# EAGLE board Placasuperiorrobocup2025_JEDM (1) (EAGLE 9.6.2)
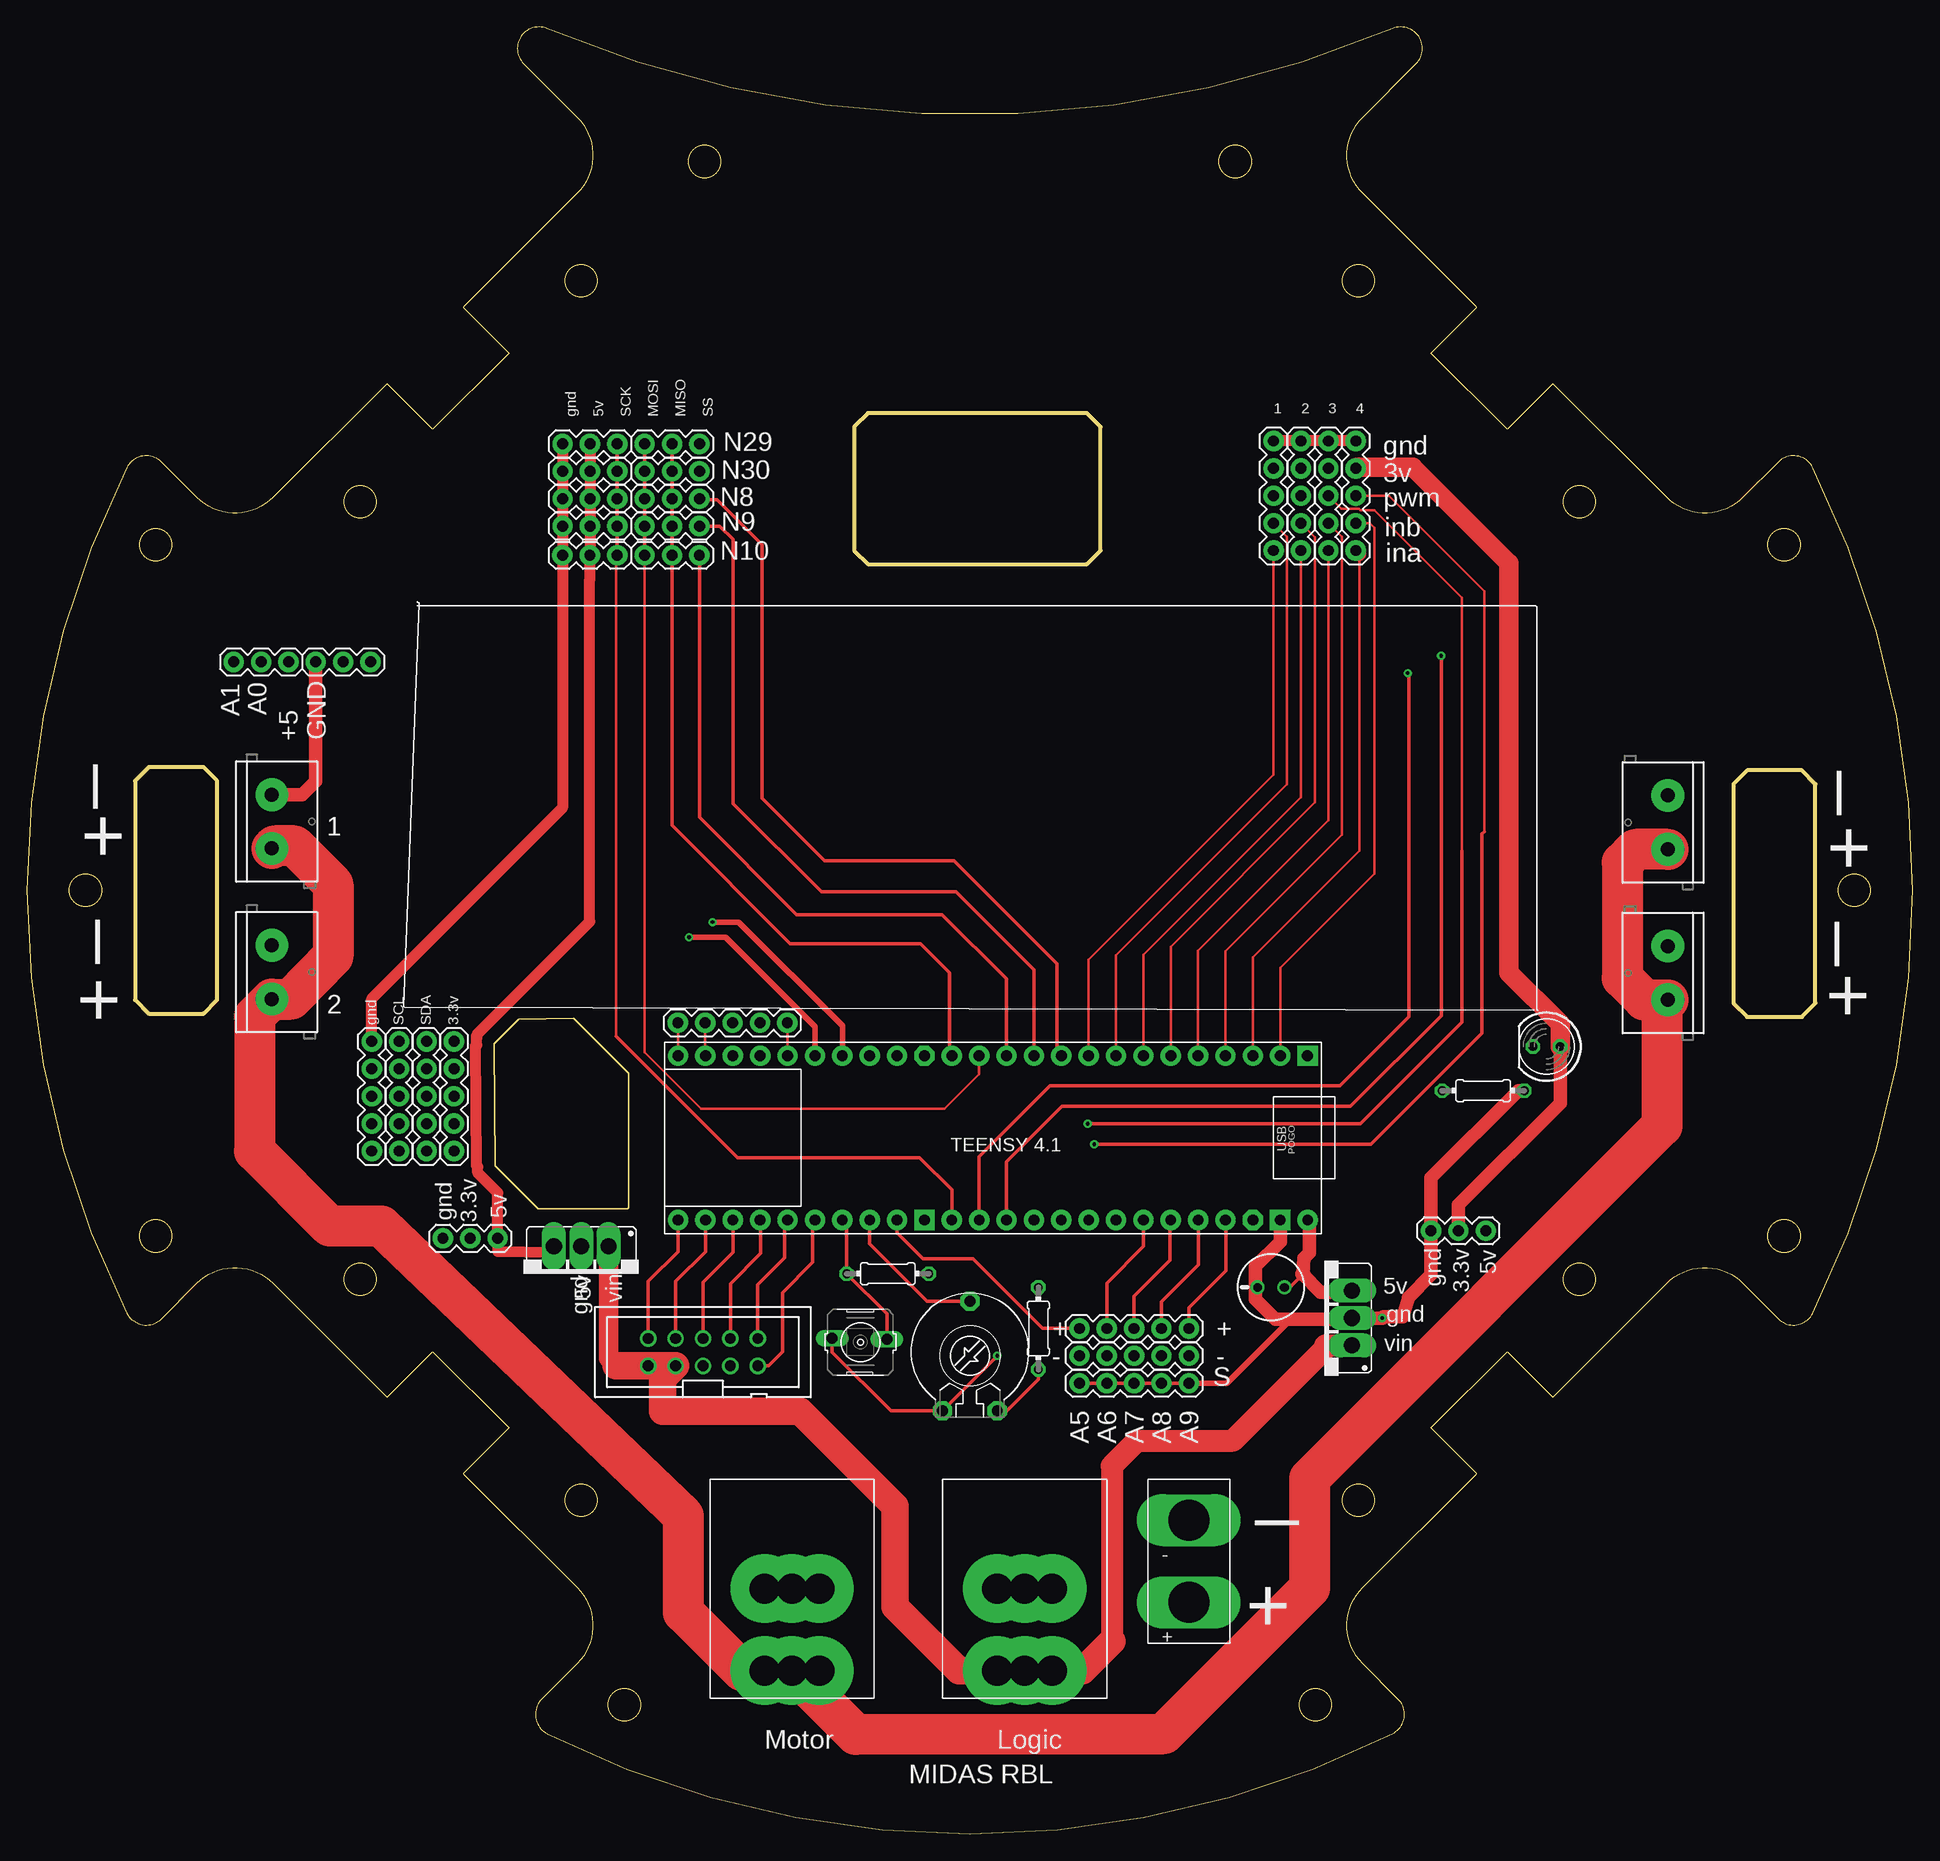
[diagram p0: board, top side]
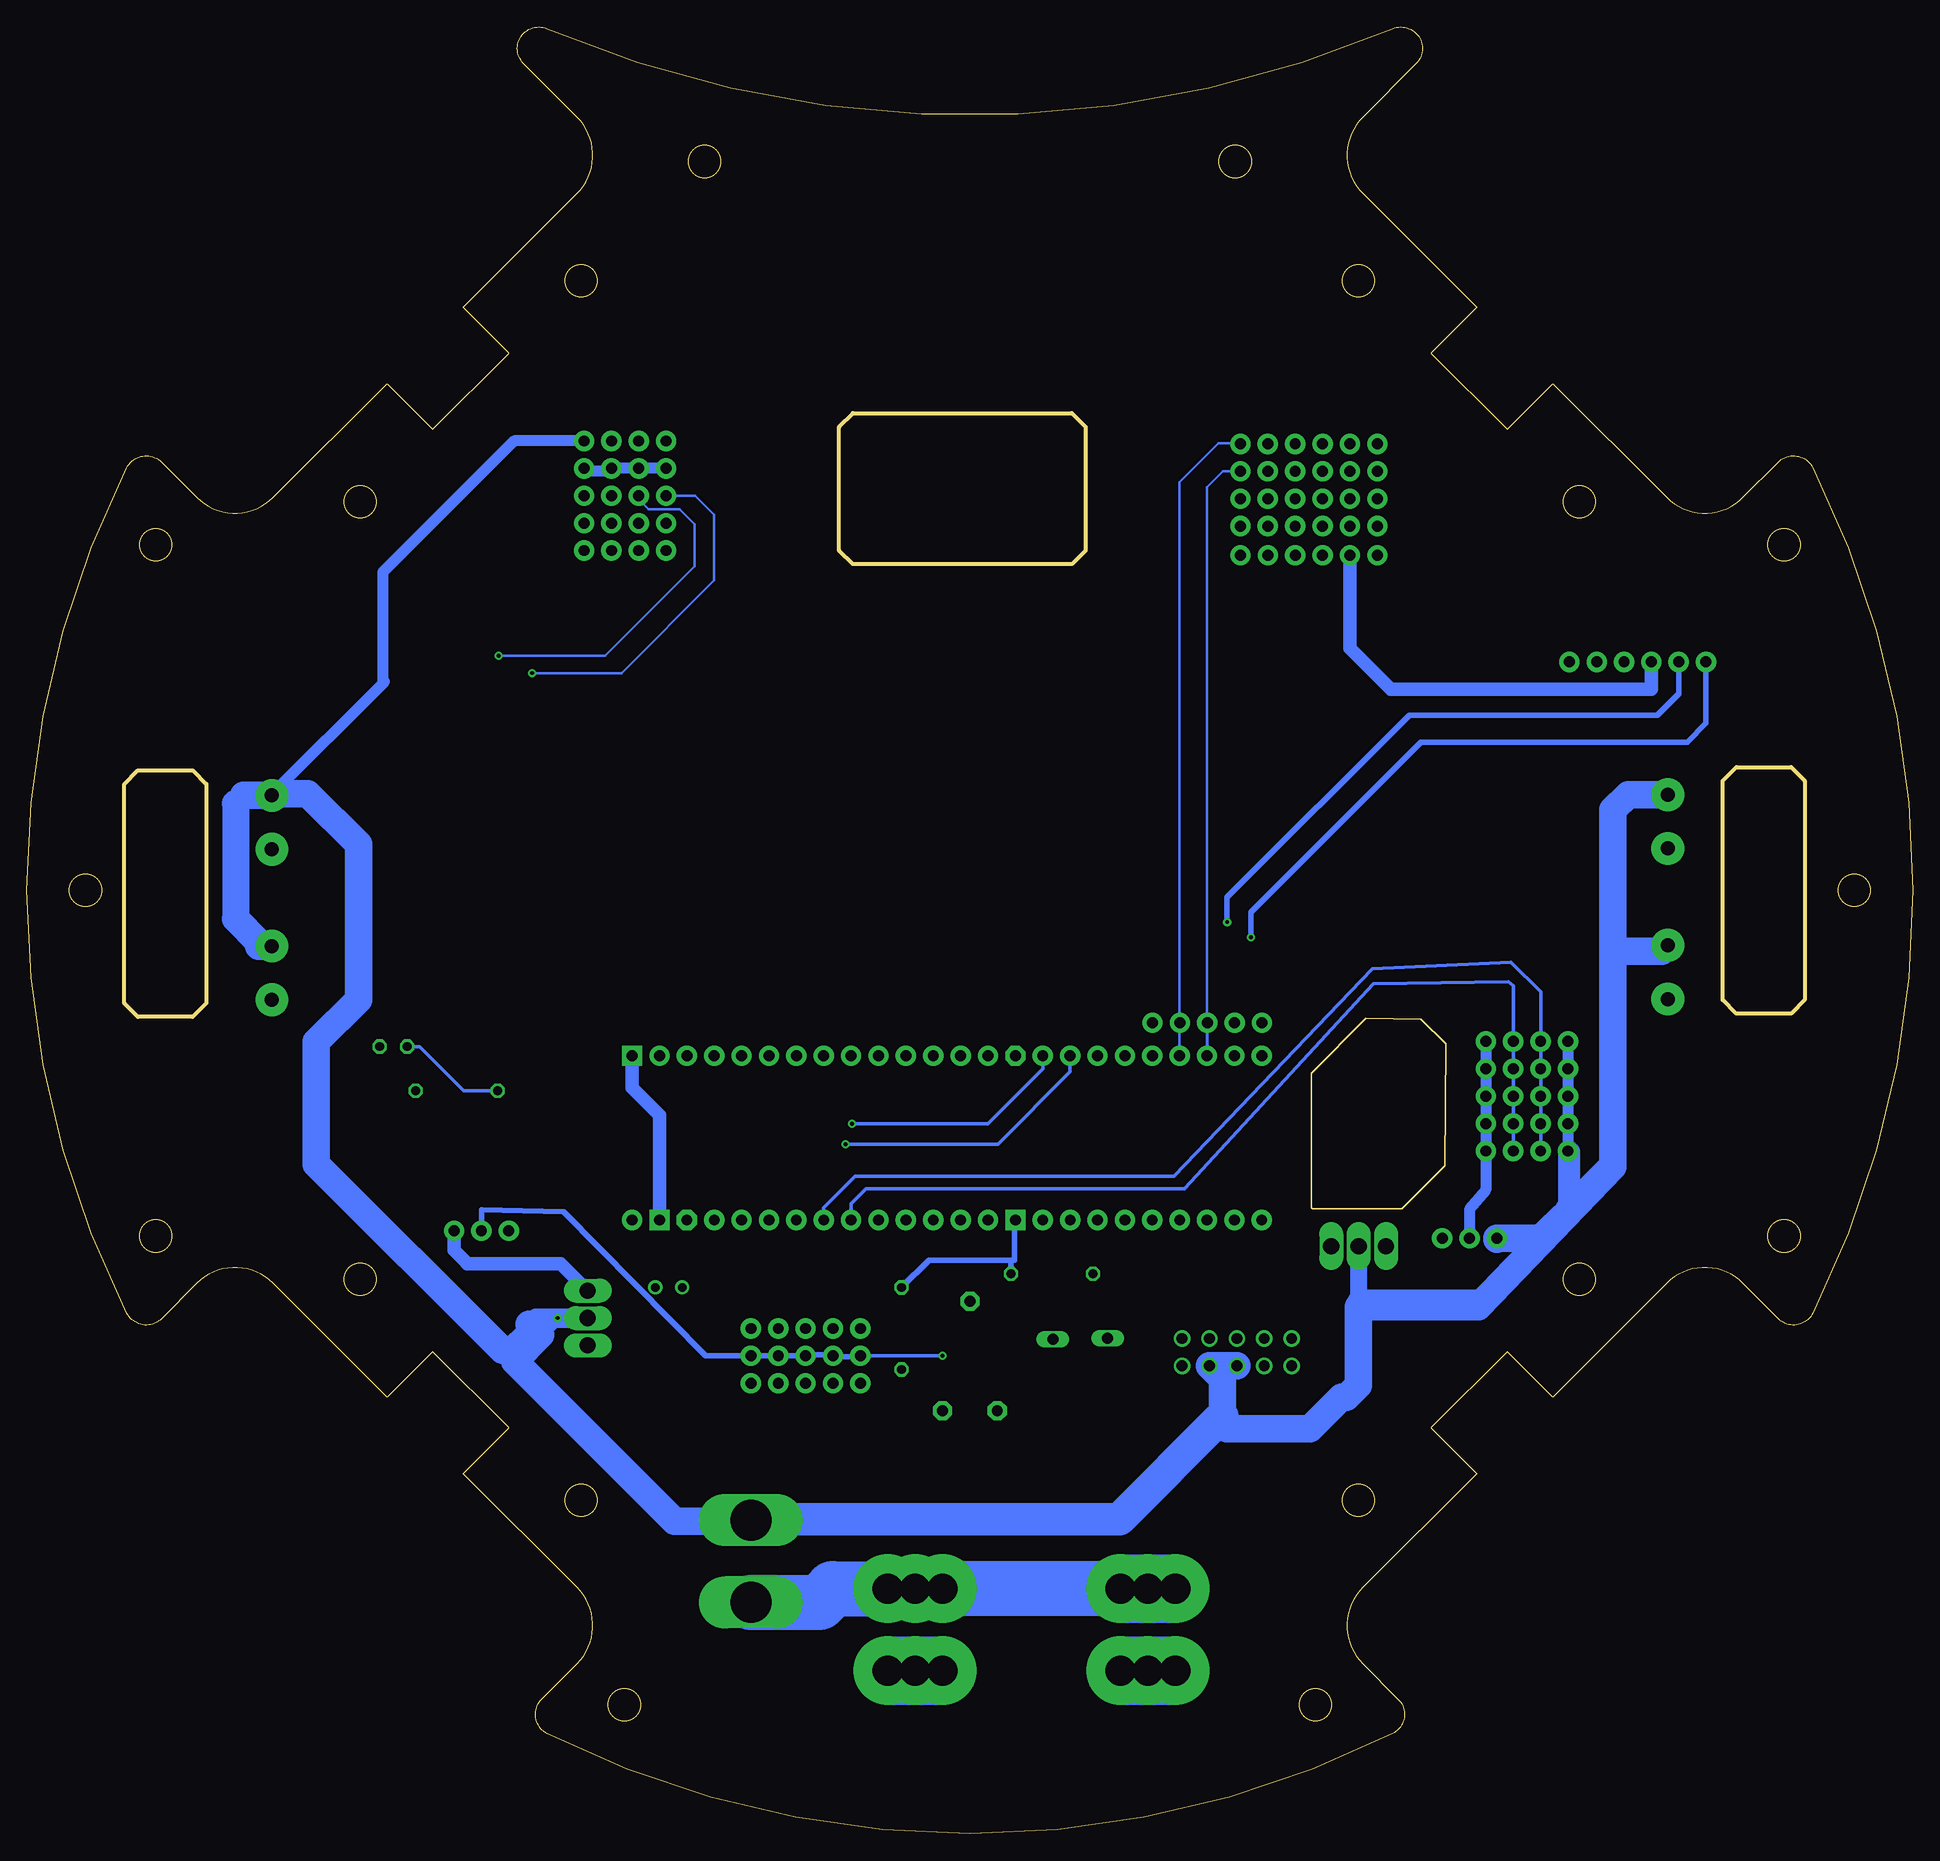
[diagram p1: board, bottom side, seen from below]

Size 175 x 167.6 mm. Coordinates in mm from the lower left corner, seen from the top.
Outline: 51.05,159.23 arc-90 51.05,152.16 40.48,141.59 44.72,137.35 37.65,130.28 33.41,134.52 22.84,123.95 arc-90 15.77,123.95 12.48,127.24 arc108 9.28,126.72 arc53 9.28,48.28 arc108 12.48,47.76 15.77,51.05 arc-90 22.84,51.05 33.41,40.48 37.65,44.72 44.72,37.65 40.48,33.41 51.05,22.84 arc-90 51.05,15.77 47.76,12.48 arc108 48.28,9.28 arc53 126.72,9.28 arc108 127.24,12.48 123.95,15.77 arc-90 123.95,22.84 134.52,33.41 130.28,37.65 137.35,44.72 141.59,40.48 152.16,51.05 arc-90 159.23,51.05 162.52,47.76 arc108 165.72,48.28 arc53 165.72,126.72 arc108 162.52,127.24 159.23,123.95 arc-90 152.16,123.95 141.59,134.52 137.35,130.28 130.28,137.35 134.52,141.59 123.95,152.16 arc-90 123.95,159.23 128.91,164.19 arc158 126.71,167.44 arc-46 48.29,167.44 arc158 46.09,164.19 51.05,159.23
Outline: 17.65,77.34 17.65,97.66 16.38,98.93 11.3,98.93 10.03,97.66 10.03,77.34 11.3,76.07 16.38,76.07 17.65,77.34
Outline: 158.35,97.36 158.35,77.04 159.62,75.77 164.7,75.77 165.97,77.04 165.97,97.36 164.7,98.63 159.62,98.63 158.35,97.36
Outline: 98.35,131.78 78.03,131.78 76.76,130.51 76.76,119.03 78.03,117.76 98.35,117.76 99.62,119.03 99.62,130.51 98.35,131.78
Outline: 43.33,73.26 45.63,75.56 50.73,75.66 55.83,70.56 55.83,58.06 55.73,57.96 47.43,57.96 43.43,61.96 43.33,73.16 43.33,73.26
Outline: circle at 144.07,51.44 radius 1.5
Outline: circle at 123.56,30.93 radius 1.5
Outline: circle at 62.89,155.12 radius 1.5
Outline: circle at 169.57,87.5 radius 1.5
Outline: circle at 5.43,87.5 radius 1.5
Outline: circle at 119.57,11.96 radius 1.5
Outline: circle at 119.57,11.96 radius 1.5
Outline: circle at 55.43,11.96 radius 1.5
Outline: circle at 30.93,51.44 radius 1.5
Outline: circle at 51.44,30.93 radius 1.5
Outline: circle at 144.07,123.56 radius 1.5
Outline: circle at 123.56,144.07 radius 1.5
Outline: circle at 30.93,123.56 radius 1.5
Outline: circle at 51.44,144.07 radius 1.5
Outline: circle at 163.04,55.43 radius 1.5
Outline: circle at 163.04,119.57 radius 1.5
Outline: circle at 11.96,55.43 radius 1.5
Outline: circle at 11.96,119.57 radius 1.5
Outline: circle at 112.11,155.12 radius 1.5
Copper layers (1*16): Top 0.035mm / dielectric 1.5mm / Bottom 0.035mm
Design rules "default": minimum track width 6mil, minimum drill 0.35mm, track to track 6mil, track to pad 6mil, pad to pad 6mil, via to via 6mil, smd to smd 6mil, copper to edge 40mil, drill to drill 6mil, minimum pad ring 10mil, minimum via ring 8mil, stop-mask expansion 4mil, vias tented up to drill 0mil, thermal gap 10mil

## Footprints (pad centres in the part's own frame; a part is rotated, then mirrored left to right if it is on the bottom)
0204/7 = drill 0.813 octagon: 1 -3.81,0; 2 3.81,0
1X05 = drill 1.016 pad 1.88: 1 0,0; 2 2.54,0; 3 5.08,0; 4 7.62,0; 5 10.16,0
SCREWTERMINAL-5MM-2 = drill 1.3 pad 3.048: 1 0,0; 2 5,0
78XXS_ = drill 1.499 pad 1.93 long: GND 0,-2.54; IN -2.54,-2.54; OUT 2.54,-2.54
1X03 = drill 1.016 pad 1.88: 1 0,0; 2 2.54,0; 3 5.08,0
TEENSY41 = drill 1.016 pad 1.88: 0-RX1/CS1/CRX2 -27.94,-7.62; 1-TX1/MISO1/CTX2 -25.4,-7.62; 2-OUT2 -22.86,-7.62; 3-LRCLK2 -20.32,-7.62; 4-BCLK2 -17.78,-7.62; 5-IN2 -15.24,-7.62; 6-OUT1D -12.7,-7.62; 7-RX2/OUT1A -10.16,-7.62; 8-TX2/IN2 -7.62,-7.62; 9-OUT1C -5.08,-7.62; 10-CS\MQSR -2.54,-7.62; 11-MOSI/CTX1 0,-7.62; 12-MISO/MQSL 2.54,-7.62; 24-A10/TX6/SCL2 7.62,-7.62; 25-A11/RX6/SDA2 10.16,-7.62; 26-A12/MOSI1 12.7,-7.62; 27-A13/SCK1 15.24,-7.62; 28-RX7 17.78,-7.62; 29-TX7 20.32,-7.62; 30-CRX3 22.86,-7.62; 31-CTX3 25.4,-7.62; 32-OUT1B 27.94,-7.62 | drill 1.016 pad 1.88 octagon: 3V3-1 5.08,-7.62 | drill 1 pad 1.88 octagon: 3V3-3 -25.4,7.62 | drill 1 pad 1.88: 13-SCK/LED 2.54,7.62; 14-A0/TX3/SPDIF_OUT 0,7.62; 15-A1/RX3/SPDIF_IN -2.54,7.62; 16-A2/RX4/SCL1 -5.08,7.62; 17-A3/TX4/SDA1 -7.62,7.62; 18-A4/SDA0 -10.16,7.62; 19-A5/SCL0 -12.7,7.62; 20-A6/TX5/LRCLK1 -15.24,7.62; 21-A7/RX5/BCLK1 -17.78,7.62; 22-A8/CTX1 -20.32,7.62; 23-A9/CRX1/MCLK1 -22.86,7.62; 33-MCLK2 27.94,7.62; 34-RX8 25.4,7.62; 35-TX8 22.86,7.62; 36-PWM 20.32,7.62; 37-PWM 17.78,7.62; 38-A14/CS/IN1 15.24,7.62; 39-A15/CS/OUT1A 12.7,7.62; 40-A16/CS1 10.16,7.62; 41-A17/MISO1 7.62,7.62; VIN -30.48,7.62 | drill 1.016 pad 1.88 square: GND1 -30.48,-7.62 | drill 1 pad 1.88 square: GND3 5.08,7.62; GND6 -27.94,7.62
PAK100/2500-10 = drill 1 pad 1.422: 1 -5.08,-1.27; 2 -5.08,1.27; 3 -2.54,-1.27; 4 -2.54,1.27; 5 0,-1.27; 6 0,1.27; 7 2.54,-1.27; 8 2.54,1.27; 9 5.08,-1.27; 10 5.08,1.27
PT-10 = drill 1.016 pad 1.778 octagon: 1 -2.54,-5.08; 2 2.54,-5.08; 3 0,5.08
B3F-10XX = drill 1.016 long: 1 -2.616,0.356; 3 2.464,0.279
LED5MM = drill 0.813 octagon: A -1.27,0; K 1.27,0
INTERRUPTOR = drill 2.794 pad 6.35: VNH1 7.62,2.54; VNH2 7.62,10.16; VNH3 5.08,2.54; VNH4 10.16,2.54; VNH5 10.16,10.16; VNH6 5.08,10.16
LIPO = drill 3.81 long: VNH1 3.81,3.81; VNH2 3.81,11.43
SANYO-OSCON_C = drill 0.8 pad 1.27: + 1.25,0; - -1.25,0

## Placement (x,y rotation side)
E$1  10K  [0204/7]  135.13,68.92 180 top
E$2  [1X05]  120.76,119.03 90 top
E$3  [0204/7]  79.88,51.94 180 top
E$4  [1X05]  97.66,46.86 0 top
E$5  [0204/7]  93.85,46.86 270 top
E$6  [1X05]  118.22,119.03 90 top
E$7  [SCREWTERMINAL-5MM-2]  22.73,82.42 270 top
E$8  [SCREWTERMINAL-5MM-2]  152.27,77.34 90 top
E$9  [SCREWTERMINAL-5MM-2]  152.27,91.31 90 top
E$10  [1X05]  123.3,119.03 90 top
E$11  [78XXS_]  120.42,47.83 90 top
E$12  [1X03]  49.7,121.3 0 top
E$13  [1X03]  57.32,121.3 0 top
E$14  [1X03]  49.7,123.84 0 top
E$15  [1X05]  115.68,119.03 90 top
E$16  [1X03]  57.32,123.84 0 top
E$17  [1X03]  19.19,108.69 0 top
E$18  [1X03]  49.7,126.38 0 top
E$19  [1X03]  57.32,126.38 0 top
E$20  [1X03]  49.7,128.92 0 top
E$21  [1X03]  57.32,128.92 0 top
E$22  [1X05]  39.62,63.33 90 top
E$23  [TEENSY41]  88.36,64.54 180 top
E$24  [1X05]  97.66,44.32 0 top
E$25  [1X05]  97.66,41.78 0 top
E$26  [1X05]  37.08,63.33 90 top
E$27  [1X05]  34.54,63.33 90 top
E$28  [1X05]  32,63.33 90 top
E$29  [1X03]  49.69,118.59 0 top
E$30  [1X03]  57.31,118.59 0 top
E$31  [78XXS_]  51.43,51.96 180 top
E$32  [1X03]  38.6,55.22 0 top
E$33  [PAK100/2500-10]  62.73,44.66 0 top
E$34  [1X03]  26.79,108.69 0 top
E$35  [1X05]  70.56,75.21 180 top
E$39  [PT-10]  87.5,44.32 0 top
E$40  [B3F-10XX]  77.34,45.59 0 top
E$50  [1X03]  135.37,55.93 180 top
E$51  [LED5MM]  141,73.01 180 top
E$57  [SCREWTERMINAL-5MM-2]  22.73,96.39 270 top
E$65  [INTERRUPTOR]  63.37,12.57 0 top
E$66  [INTERRUPTOR]  84.96,12.57 0 top
E$68  [LIPO]  104.01,17.65 0 top
E$69  [SANYO-OSCON_C]  115.44,50.67 0 top

## Library data of the parts
E$1 E$3 E$5 E$39 E$69 = rcl
E$2 E$4 E$6-E$10 E$12-E$22 E$24-E$30 E$32 E$34 E$35 E$50 E$57 = SparkFun-Connectors
E$11 E$31 = v-reg
E$23 = teensy41
E$33 = con-3m
E$40 = switch-omron
E$51 = led
E$65 E$66 E$68 = Interruptor

## Nets
3.3V: E$2.4 E$6.4 E$10.4 E$15.4 E$24.1 E$24.2 E$24.3 E$24.4 E$24.5 E$39.1 E$40.1 E$50.2 E$51.A
3V3: E$22.1 E$22.2 E$22.3 E$22.4 E$22.5 E$32.2
5V: E$12.2 E$14.2 E$17.3 E$18.2 E$20.2 E$29.2 E$31.OUT E$32.3
5V_1: E$11.OUT E$23.VIN E$50.1 E$69.+
7VL: E$11.IN E$31.IN E$33.1 E$33.3 E$66.VNH1 E$66.VNH3 E$66.VNH4
7VM: E$7.2 E$8.1 E$9.1 E$57.2 E$65.VNH1 E$65.VNH3 E$65.VNH4
GND: E$1.1 E$2.5 E$6.5 E$7.1 E$8.2 E$9.2 E$10.5 E$11.GND E$12.1 E$14.1 E$15.5 E$18.1 E$20.1 E$23.GND1 E$23.GND6 E$25.1 E$25.2 E$25.3 E$25.4 E$25.5 E$28.1 E$28.2 E$28.3 E$28.4 E$28.5 E$29.1 E$31.GND E$32.1 E$33.5 E$33.7 E$34.1 E$50.3 E$57.1 E$68.VNH2 E$69.-
S$1: E$23.33-MCLK2 E$33.2
S$2: E$23.34-RX8 E$33.4
S$3: E$4.1 E$23.41-A17/MISO1
S$4: E$23.18-A4/SDA0 E$26.1 E$26.2 E$26.3 E$26.4 E$26.5
S$5: E$23.19-A5/SCL0 E$27.1 E$27.2 E$27.3 E$27.4 E$27.5
S$7: E$10.2 E$23.0-RX1/CS1/CRX2
S$8: E$3.1 E$5.1 E$23.GND3
S$12: E$12.3 E$14.3 E$18.3 E$20.3 E$23.13-SCK/LED E$29.3
S$15: E$13.2 E$16.2 E$19.2 E$21.2 E$23.12-MISO/MQSL E$30.2
S$18: E$23.35-TX8 E$33.6
S$20: E$23.36-PWM E$33.8
S$21: E$23.37-PWM E$33.10
S$23: E$23.38-A14/CS/IN1 E$33.9
S$25: E$4.5 E$23.23-A9/CRX1/MCLK1
S$26: E$4.4 E$23.22-A8/CTX1
S$27: E$4.3 E$23.21-A7/RX5/BCLK1
S$28: E$4.2 E$23.20-A6/TX5/LRCLK1
S$32: E$19.3 E$23.30-CRX3 E$35.3
S$36: E$2.2 E$23.2-OUT2
S$37: E$21.3 E$23.29-TX7 E$35.2
S$39: E$17.2 E$23.26-A12/MOSI1
S$40: E$16.3 E$23.8-TX2/IN2
S$42: E$13.3 E$23.9-OUT1C
S$44: E$1.2 E$51.K
S$45: E$23.10-CS\MQSR E$30.3
S$47: E$2.1 E$23.3-LRCLK2
S$50: E$6.2 E$23.4-BCLK2
S$51: E$15.2 E$23.6-OUT1D
S$52: E$15.1 E$23.7-RX2/OUT1A
S$53: E$10.3 E$23.25-A11/RX6/SDA2
S$54: E$2.3 E$23.24-A10/TX6/SCL2
S$55: E$6.3 E$23.15-A1/RX3/SPDIF_IN
S$56: E$15.3 E$23.14-A0/TX3/SPDIF_OUT
S$57: E$23.40-A16/CS1 E$39.3
S$58: E$3.2 E$23.39-A15/CS/OUT1A E$40.3
S$59: E$17.1 E$23.27-A13/SCK1
S$60: E$10.1 E$23.1-TX1/MISO1/CTX2
S$61: E$23.32-OUT1B E$35.5
S$62: E$13.1 E$16.1 E$19.1 E$21.1 E$23.11-MOSI/CTX1 E$30.1
S$63: E$23.31-CTX3 E$35.4
S$64: E$23.28-RX7 E$35.1
S$67: E$5.2 E$39.2
S$70: E$6.1 E$23.5-IN2
S$71: E$65.VNH2 E$65.VNH5 E$65.VNH6 E$66.VNH2 E$66.VNH5 E$66.VNH6 E$68.VNH1

## Tracks (layer width: path | path; a pad name or v marks a point on that pad's centre or on a via)
3.3V  (via drill 0.35)
  Top 0.305: v90.04,44.32 E$39.1 80.16,39.24 74.72,44.68 E$40.1
  Top 1.27: E$51.A 142.27,67.77 132.83,58.33 E$50.2
  Top 1.8: E$51.A 142.27,75.12 137.53,79.86 137.53,117.86 128.63,126.76 123.41,126.76 E$10.4
  Bottom 0.305: v90.04,44.32 E$24.1
  Bottom 0.508: E$24.1 97.76,44.22 100.1,44.22 E$24.2 100.3,44.42 102.64,44.42 E$24.3 E$24.4 E$24.5 112.02,44.32 125.21,57.67 132.83,57.87 E$50.2
  Bottom 1.016: E$15.4 E$6.4 E$2.4 120.96,126.45 123.1,126.45 E$10.4
3V3
  Bottom 1.016: E$32.2 41.14,57.91 39.62,59.7 E$22.1 E$22.2 E$22.3 E$22.4 E$22.5
5V
  Top 0.152: E$29.2
  Top 1.016: E$20.2 E$18.2 E$14.2 E$12.2 E$29.2 | E$29.2 52.23,116.36 52.23,84.6 41.73,74.1 41.73,73.81 41.72,73.81 41.73,73.15 41.63,73.05 41.72,61.96 41.83,61.85 41.83,61.29 43.68,59.44 E$32.3 43.68,54.02 48.79,53.91 48.62,54.77 E$31.OUT
  Bottom 1.27: E$17.3 24.27,106.16 48.43,106.16 52.23,109.96 E$29.2
5V_1
  Top 0.152: E$11.OUT 122.94,50.35
  Top 0.305: E$69.+ 117.19,50.67 118.4,51.88 118.45,51.93
  Top 1.27: E$23.VIN 119.01,56.75 119.01,53.87 118.51,53.37 118.39,51.93 | 118.4,51.88 120.05,50.23 122.94,50.23 122.94,50.35
  Top 1.37: 118.39,51.93 118.45,51.93
  Bottom 1.27: E$50.1 135.37,54.13 134.17,52.93 134.17,52.86 125.46,52.86 125.46,52.87 E$11.OUT
7VL
  Top 0.152: 120.45,44.99 120.45,45.29
  Top 1.8: E$31.IN 53.97,44.1 54.68,43.39
  Top 2.032: 100.68,17.85 100.68,34.12 103.03,36.47 111.93,36.47 120.45,44.99 | 120.45,45.29 E$11.IN
  Top 2.54: 100.68,17.85 97.94,15.11 E$66.VNH3 86.48,15.11 80.53,21.06 80.53,30.36 71.73,39.16 58.99,39.16 58.99,42.19 E$33.3 E$33.1 54.68,43.39
  Bottom 5.08: E$66.VNH3 E$66.VNH1
  Bottom 6.35: E$66.VNH3 E$66.VNH4
7VM
  Top 0.152: E$8.1 151.73,76.8
  Top 3.81: E$57.2 22.97,91.63 24.83,91.63 28.4,88.06 28.4,81.39 24.53,77.42 E$7.2 21.13,75.82 21.13,63.33 28.1,56.36 32.88,56.36 60.93,29.46 60.93,20.52 66.34,15.11 E$65.VNH3 E$65.VNH1 76.9,9.2 105.52,9.28 119.03,22.79 119.03,32.96 151.73,65.66 151.73,76.8 | E$9.1 149.27,91.31 148.03,90.07 148.03,79.38 150.07,77.34 E$8.1
  Bottom 5.08: E$65.VNH3 E$65.VNH1
  Bottom 6.35: E$65.VNH3 E$65.VNH4
GND  (via drill 0.35)
  Top 0.152: E$29.1
  Top 0.305: E$69.- 113.99,50.87 113.99,52.07 116,54.08 116,56.62 E$23.GND6 | E$25.1 E$25.2 E$25.3 E$25.4 105.55,41.51 105.82,41.78 E$25.5
  Top 0.508: E$25.5 111.34,41.78 117.39,47.83 E$11.GND
  Top 1.016: E$28.5 32,77.46 49.69,95.15 E$29.1 | E$20.1 E$18.1 E$14.1 E$12.1 E$29.1 | E$10.5 E$2.5 E$6.5 E$15.5
  Top 1.27: E$1.1 138.39,68.92 130.29,60.82 E$50.3 130.29,51.83 128.19,49.73 128.19,49.68 127.66,47.96 125.89,47.96 v125.76,47.83 E$11.GND 122.86,47.73 115.86,47.73 114,49.59 114,52.62 116.3,54.92 E$23.GND6 | E$34.1 26.79,97.62 25.56,96.39 E$57.1
  Bottom 0.152: 23.29,81.86 E$7.1 | 27.83,82.36 27.33,81.86 | E$28.1 31.9,63.23 | 148.93,96.46 149.13,96.26
  Bottom 1.016: 152.02,96.46 152.02,96.36 152.07,96.31 E$9.2 | E$28.1 E$28.2 E$28.3 E$28.4 E$28.5 | E$10.5 129.8,129.19 141.97,117.02 141.97,106.86 141.83,106.86 152.43,96.26
  Bottom 1.27: 130.87,44.83 128.42,47.28 | 127.32,46.28 v125.76,47.83 | 154.88,96.31 155.63,95.56 | 149.13,96.26 152.43,96.26 | E$23.GND6 116.3,66.63 118.84,69.17 E$23.GND1
  Bottom 1.6: E$31.GND 51.43,49.42
  Bottom 1.8: E$11.GND 127.76,47.83 128.32,47.28
  Bottom 2.032: 31.9,57.7 31.9,57.89 31.9,63.23 | 38.6,55.12 35.39,55.12 34.83,54.56 34.83,54.36 39.77,49.42 51.43,49.42
  Bottom 2.51: 155.63,95.56 155.63,84.86
  Bottom 2.54: 31.9,57.7 34.51,55.22 E$32.1 38.6,55.12 | E$68.VNH2 107.92,28.98 114.92,28.98 129.77,43.83 127.32,46.28 128.32,47.28 128.42,47.28 | 130.87,44.83 148.14,62.1 148.14,73.45 144.23,77.36 144.23,91.76 148.93,96.46 152.02,96.46 | E$33.5 E$33.7 64.08,42.2 64.08,38.71 | 64.33,38.47 63.63,37.56 55.93,37.56 53.03,40.46 52.55,40.46 51.43,41.58 51.43,48.89 40.32,48.89 27.83,61.87 27.83,61.96 | E$9.2 154.88,96.31 | 155.63,84.86 153.48,82.71 153.48,82.34 E$8.2 | E$57.1 26.4,96.39 27.83,94.96 27.83,82.36 27.83,61.96 | 27.33,81.86 23.29,81.86 | 27.83,61.96 31.9,57.89
  Bottom 3: E$68.VNH2 107.72,29.18 73.61,29.18 64.33,38.47 64.08,38.71
S$1
  Top 0.305: E$23.33-MCLK2 60.42,54 57.65,51.23 E$33.2
S$2
  Top 0.305: E$23.34-RX8 62.96,54 60.19,51.23 E$33.4
S$3
  Top 0.305: E$4.1 94.25,46.86 87.8,53.31 83.15,53.31 80.74,55.72 E$23.41-A17/MISO1
S$4
  Bottom 0.305: E$26.1 E$26.2 E$26.3 E$26.4 E$26.5 37.08,78.64 37.54,79.02 50.07,78.83 67.61,59.82 97.12,59.82 98.52,58.42 E$23.18-A4/SDA0
S$5
  Bottom 0.305: E$27.1 E$27.2 E$27.3 E$27.4 E$27.5 34.54,78.09 37.28,80.83 50.13,80.24 68.56,60.96 98.16,60.96 101.06,58.06 E$23.19-A5/SCL0
S$7
  Top 0.254: E$10.2 124.62,121.57 125.03,121.16 125.03,89.06 116.3,80.33 E$23.0-RX1/CS1/CRX2
S$8
  Bottom 0.508: 83.86,53.21 83.69,53.04 E$3.1 | 83.86,53.21 83.87,53.21 91.31,53.21 E$5.1 | 83.86,53.21 83.37,53.21 83.37,56.83 E$23.GND3
S$12
  Top 0.152: E$29.3
  Top 0.254: E$29.3 54.67,118.49 54.67,73.97
  Top 0.305: E$20.3 E$18.3 E$14.3 E$12.3 E$29.3 | E$23.13-SCK/LED 85.82,59.72 82.82,62.72 65.92,62.72 54.67,73.97
S$15
  Top 0.152: E$30.2
  Top 0.305: E$21.2 E$19.2 E$16.2 E$13.2 E$30.2 | E$30.2 59.85,93.54 70.83,82.56 82.93,82.56 85.62,79.87 85.62,72.36 E$23.12-MISO/MQSL
S$18
  Top 0.305: E$23.35-TX8 65.53,56.89 65.53,53.93 62.73,51.13 E$33.6
S$20
  Top 0.305: E$23.36-PWM 68.07,56.89 68.07,53.83 65.27,51.03 E$33.8
S$21
  Top 0.305: E$23.37-PWM 70.31,56.91 70.31,53.43 67.81,50.93 E$33.10
S$23
  Top 0.305: E$23.38-A14/CS/IN1 72.92,56.72 72.92,53 70.11,50.19 70.11,44.69 68.81,43.39 E$33.9
S$25
  Top 0.305: E$23.23-A9/CRX1/MCLK1 111.26,56.88 111.26,52.2 107.82,48.76 E$4.5
S$26
  Top 0.305: E$23.22-A8/CTX1 108.69,52.77 105.28,49.36 E$4.4
S$27
  Top 0.305: E$23.21-A7/RX5/BCLK1 106.05,56.83 106.05,53.17 102.74,49.86 E$4.3
S$28
  Top 0.305: E$23.20-A6/TX5/LRCLK1 103.61,54.47 100.2,51.06 E$4.2
S$32
  Bottom 0.152: 65.48,72.28 65.5,72.26
  Bottom 0.254: E$23.30-CRX3 65.5,72.26 65.5,124.89 64.01,126.38 E$19.3 | E$35.3 65.48,72.28
S$36
  Top 0.254: E$2.2 122.03,120.31 122.03,92.66 111.22,81.85 E$23.2-OUT2
S$37
  Bottom 0.152: E$35.2 68.04,75.19
  Bottom 0.254: E$21.3 62.44,128.96 64.43,128.96 68.04,125.35 E$23.29-TX7 68.04,75.19
S$39  (via drill 0.35)
  Top 0.508: v63.63,84.56 66.03,84.56 75.66,74.93 E$23.26-A12/MOSI1
  Bottom 0.508: E$17.2 21.73,105.76 23.73,103.76 46.73,103.76 63.63,86.86 v63.63,84.56
S$40
  Top 0.305: E$23.8-TX2/IN2 95.58,72.56 95.58,80.71 86.03,90.26 74.03,90.26 68.23,96.06 68.23,119.56 64.03,123.76 62.48,123.76 E$16.3
S$42
  Top 0.305: E$23.9-OUT1C 93.44,80.15 86.23,87.36 73.73,87.36 65.53,95.56 65.53,120.06 64.29,121.3 E$13.3
S$44
  Bottom 0.305: E$1.2 134.47,68.92 138.56,73.01 E$51.K
S$45
  Top 0.305: E$23.10-CS\MQSR 90.9,79.29 84.93,85.26 71.43,85.26 62.39,94.3 E$30.3
S$47
  Top 0.254: E$2.1 120.76,93.99 108.68,81.91 E$23.3-LRCLK2
S$50
  Top 0.254: E$6.2 119.53,120.27 119.53,95.66 106.14,82.27 E$23.4-BCLK2
S$51
  Top 0.254: E$15.2 116.93,120.33 116.93,97.36 101.06,81.49 E$23.6-OUT1D
S$52
  Top 0.254: E$23.7-RX2/OUT1A 98.52,81.05 115.68,98.21 E$15.1
S$53  (via drill 0.35)
  Top 0.254: 135.23,92.96 135.23,115.26 126.38,124.11 E$10.3
  Top 0.305: v99.03,63.96 124.73,63.96 135.03,74.26 135.03,92.76 135.23,92.96
  Bottom 0.305: v99.03,63.96 84.9,63.96 78.2,70.66 E$23.25-A11/RX6/SDA2
S$54  (via drill 0.35)
  Top 0.254: E$2.3 121.98,122.89 123.61,122.89 123.74,122.76 125.03,122.76 133.13,114.66 133.13,91.16
  Top 0.305: v98.43,65.86 123.73,65.86 133.13,75.26 133.13,91.16
  Bottom 0.305: v98.43,65.86 85.84,65.86 80.74,70.96 E$23.24-A10/TX6/SCL2
S$55  (via drill 0.35)
  Top 0.305: E$23.15-A1/RX3/SPDIF_IN 90.9,62.33 96.03,67.46 122.83,67.46 131.23,75.86 v131.23,109.26
  Bottom 0.254: E$6.3 118.22,123.75 117.33,122.86 114.43,122.86 113.03,121.46 113.03,117.56 121.33,109.26 v131.23,109.26
S$56  (via drill 0.35)
  Top 0.305: E$23.14-A0/TX3/SPDIF_OUT 88.36,62.79 94.93,69.36 121.83,69.36 128.23,75.76 128.23,107.56 v128.13,107.66
  Bottom 0.254: v128.13,107.66 119.83,107.66 111.23,116.26 111.23,122.36 112.98,124.11 E$15.3
S$57
  Top 0.305: E$39.3 83.52,49.4 78.2,54.72 E$23.40-A16/CS1
S$58
  Top 0.305: E$23.39-A15/CS/OUT1A 76.07,56.51 E$3.2 79.8,48.21 E$40.3
S$59  (via drill 0.35)
  Top 0.508: E$23.27-A13/SCK1 73.13,74.86 64.83,83.16 v61.43,83.16
  Bottom 0.508: E$17.1 19.19,103 20.93,101.26 45.63,101.26 61.43,85.46 v61.43,83.16
S$60
  Top 0.254: E$23.1-TX1/MISO1/CTX2 113.76,81.29 123.63,91.16 123.63,118.71
  Top 1.27: 123.63,118.71 E$10.1
S$61
  Top 0.152: 60.4,72.18 E$23.32-OUT1B
  Top 0.254: E$35.5 60.4,72.18
S$62
  Top 0.152: E$30.1
  Top 0.254: E$23.11-MOSI/CTX1 88.36,70.46 85.16,67.26 62.56,67.26 57.31,72.51 E$30.1
  Top 0.305: E$21.1 E$19.1 E$16.1 E$13.1 E$30.1
S$63
  Top 0.152: E$23.31-CTX3 62.94,72.18
  Top 0.254: 62.94,72.18 E$35.4
S$64
  Top 0.152: 70.56,72.18 E$23.28-RX7
  Top 0.254: E$35.1 70.56,72.18
S$67
  Top 0.305: E$5.2 93.85,42.15 90.94,39.24 E$39.2
S$70
  Top 0.254: E$6.1 118.22,96.15 103.6,81.53 E$23.5-IN2
S$71
  Bottom 3.81: E$66.VNH6 E$66.VNH5 | E$65.VNH2 E$65.VNH6
  Bottom 5.08: E$65.VNH2 E$66.VNH6 | E$68.VNH1 101.47,21.46 100.2,22.73 E$66.VNH5 E$66.VNH2
  Bottom 6.35: E$65.VNH6 E$65.VNH5

## Text on the board
tPlace: 1 | 2 | 3 | 4 | gnd | 5v | SCK | MOSI | MISO | SS | N29 | gnd | N30 | 3v | N8 | pwm | N9 | inb | N10 | ina | A1 | A0 | +5 | GND | _ | _ | 1 | + | + | _ | _ | 2 | + | gnd | SCL | SDA | 3.3v | + | gnd | 3.3v | 5v | 3.3v | 5v | gnd | 5v | 5v | vin | gnd | + | + | gnd | vin | - | - | S | A5 | A6 | A7 | A8 | A9 | _ | + | Motor | Logic | MIDAS RBL